# EAGLE board BUZZI-43 (EAGLE 4.15)
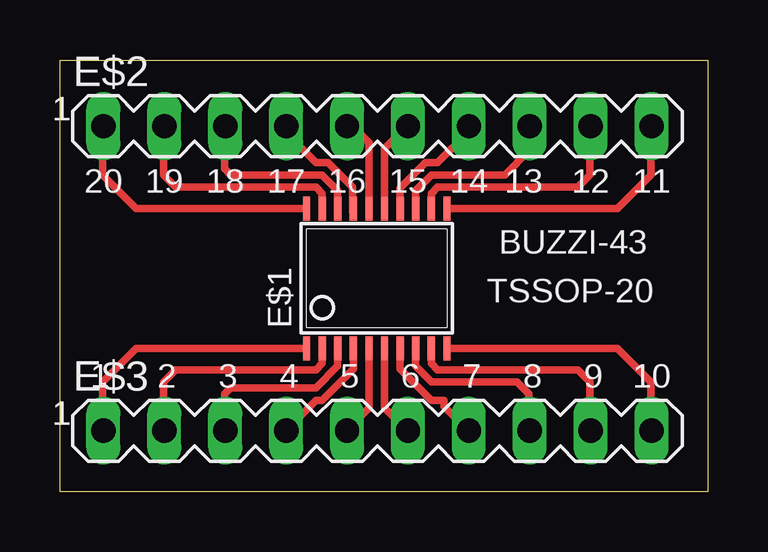
[diagram p0: board, top side]

Size 27 x 18 mm. Coordinates in mm from the lower left corner, seen from the top.
Outline: 0,0 0,18 27,18 27,0 0,0
Copper layers (1*16): Top 0.035mm / dielectric 1.5mm / Bottom 0.035mm
Design rules "PCB-POOL": minimum track width 6mil, minimum drill 12mil, track to track 6mil, track to pad 6mil, pad to pad 6mil, via to via 6mil, smd to smd 6mil, copper to edge 20mil, drill to drill 8mil, minimum pad ring 8mil, minimum via ring 6mil, stop-mask expansion 3mil, vias tented up to drill 0mil, thermal gap 8mil

## Footprints (pad centres in the part's own frame; a part is rotated, then mirrored left to right if it is on the bottom)
TSSOP20 = smd 0.305 x 0.991: 1 -2.925,-2.918; 2 -2.275,-2.918; 3 -1.625,-2.918; 4 -0.975,-2.918; 5 -0.325,-2.918; 6 0.325,-2.918; 7 0.975,-2.918; 8 1.625,-2.918; 9 2.275,-2.918; 10 2.925,-2.918; 11 2.925,2.918; 12 2.275,2.918; 13 1.625,2.918; 14 0.975,2.918; 15 0.325,2.918; 16 -0.325,2.918; 17 -0.975,2.918; 18 -1.625,2.918; 19 -2.275,2.918; 20 -2.925,2.918
MA10-1 = drill 1.016 long: 1 -11.43,0; 2 -8.89,0; 3 -6.35,0; 4 -3.81,0; 5 -1.27,0; 6 1.27,0; 7 3.81,0; 8 6.35,0; 9 8.89,0; 10 11.43,0

## Placement (x,y rotation side)
E$1  [TSSOP20]  13.21,8.89 0 top
E$2  [MA10-1]  13.24,15.24 0 top
E$3  [MA10-1]  13.24,2.54 0 top

## Library data of the parts
E$1 = ref-packages
E$2 E$3 = con-lstb

## Nets
S$1: E$1.20 E$2.1
S$2: E$1.19 E$2.2
S$3: E$1.18 E$2.3
S$4: E$1.17 E$2.4
S$5: E$1.16 E$2.5
S$6: E$1.15 E$2.6
S$7: E$1.14 E$2.7
S$8: E$1.13 E$2.8
S$9: E$1.12 E$2.9
S$10: E$1.11 E$2.10
S$11: E$1.1 E$3.1
S$12: E$1.2 E$3.2
S$13: E$1.3 E$3.3
S$14: E$1.4 E$3.4
S$15: E$1.5 E$3.5
S$16: E$1.6 E$3.6
S$17: E$1.7 E$3.7
S$18: E$1.8 E$3.8
S$19: E$1.9 E$3.9
S$20: E$1.10 E$3.10

## Tracks (layer width: path | path; a pad name or v marks a point on that pad's centre or on a via)
S$1
  Top 0.305: E$1.20 3.18,11.81 1.78,13.21 1.78,15.24 E$2.1
S$2
  Top 0.305: E$1.19 10.93,12.44 10.67,12.7 4.83,12.7 4.32,13.21 4.32,15.24 E$2.2
S$3
  Top 0.305: E$1.18 11.58,12.55 10.92,13.21 7.11,13.21 6.86,13.46 6.86,15.24 E$2.3
S$4
  Top 0.305: E$2.4 9.43,14.95 10.67,13.72 11.18,13.72 12.19,12.7 12.19,11.68 12.23,11.72 E$1.17
S$5
  Top 0.305: E$2.5 12.19,15.24 12.88,14.55 E$1.16
S$6
  Top 0.305: E$2.6 14.48,15.24 13.53,14.29 E$1.15
S$7
  Top 0.305: E$1.14 14.18,12.66 15.24,13.72 15.75,13.72 17.05,15.02 E$2.7
S$8
  Top 0.305: E$1.13 14.83,12.55 15.49,13.21 18.54,13.21 19.56,14.22 19.56,15.24 E$2.8
S$9
  Top 0.305: E$1.12 15.48,12.44 15.75,12.7 21.59,12.7 22.1,13.21 22.1,14.99 22.13,15.02 E$2.9
S$10
  Top 0.305: E$1.11 23.24,11.81 24.64,13.21 24.64,15.24 E$2.10
S$11
  Top 0.305: E$1.1 3.18,5.97 1.78,4.57 1.78,2.29 1.81,2.32 E$3.1
S$12
  Top 0.305: E$1.2 10.93,5.34 10.67,5.08 4.83,5.08 4.32,4.57 4.32,2.54 E$3.2
S$13
  Top 0.305: E$1.3 11.58,5.23 10.67,4.32 7.11,4.32 6.86,4.06 6.86,2.79 7.11,2.54 E$3.3
S$14
  Top 0.305: E$1.4 12.23,5.12 10.92,3.81 10.67,3.81 9.4,2.54 E$3.4
S$15
  Top 0.305: E$3.5 11.94,2.54 12.88,3.48 E$1.5
S$16
  Top 0.305: E$3.6 14.48,2.54 13.53,3.48 E$1.6
S$17
  Top 0.305: E$1.7 14.18,5.12 15.49,3.81 16,3.81 16,3.56 17.02,2.54 E$3.7
S$18
  Top 0.305: E$1.8 14.83,5.23 15.49,4.57 19.05,4.57 19.56,4.06 19.56,2.54 E$3.8
S$19
  Top 0.305: E$1.9 15.48,5.34 15.75,5.08 21.59,5.08 22.1,4.57 22.1,2.54 E$3.9
S$20
  Top 0.305: E$1.10 23.24,5.97 24.64,4.57 24.64,2.54 E$3.10

## Text on the board
tNames: 20 | 19 | 18 | 17 | 16 | 15 | 14 | 13 | 12 | 11 | BUZZI-43 | TSSOP-20 | 1 | 2 | 3 | 4 | 5 | 6 | 7 | 8 | 9 | 10